# Altium PCB Buzzer_PCB.PcbDoc
Units mm, origin at the board's own origin, x right, y up, seen from the top; angles counter-clockwise.
Board outline 18.5 x 30 mm, 2 copper layers (Top Layer, Bottom Layer), stack 1.571 mm thick; 6 components, 5 nets, 18 pads, 0 vias.
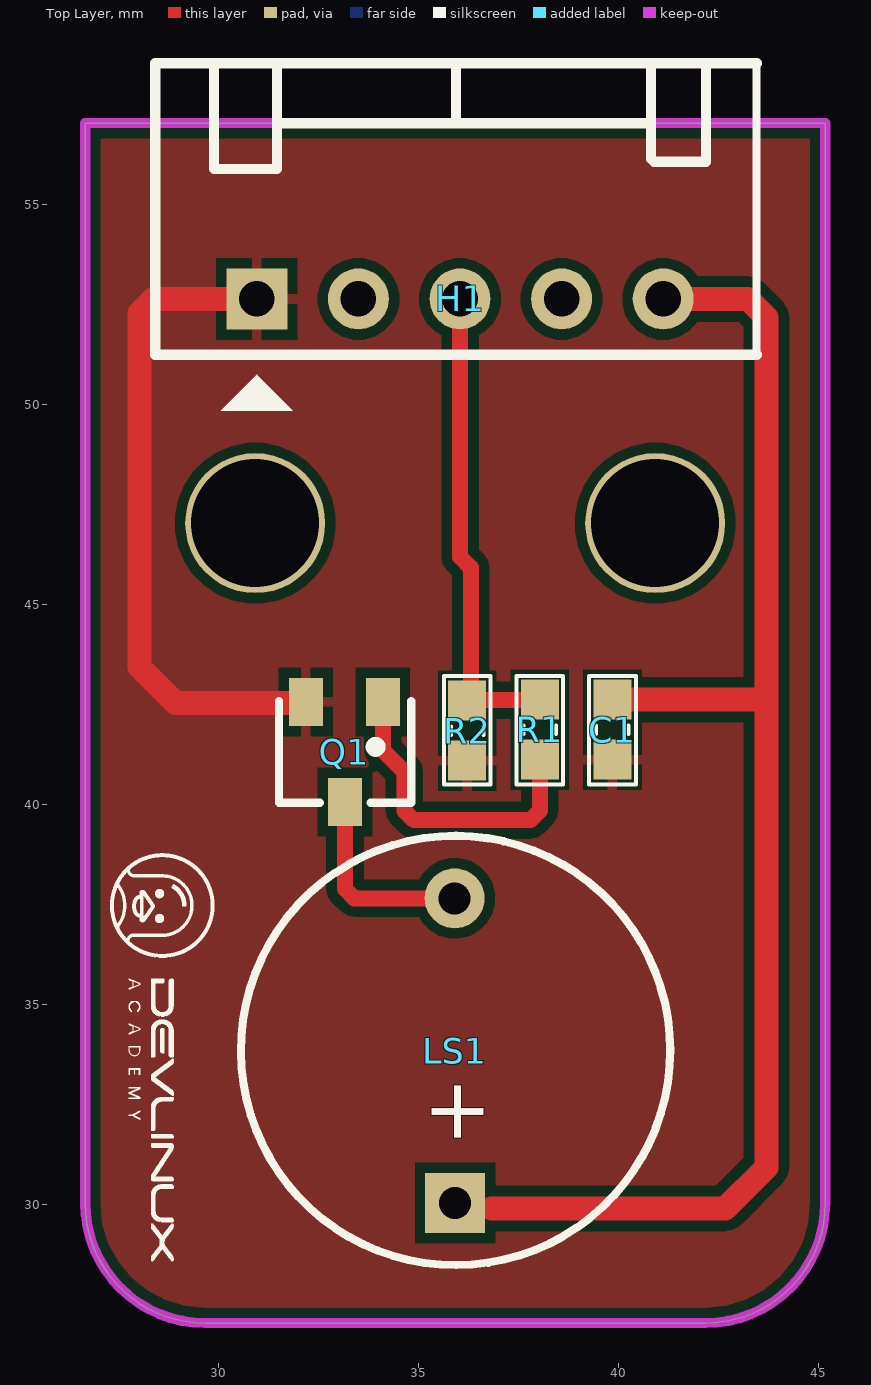
[diagram p0: Top Layer view]
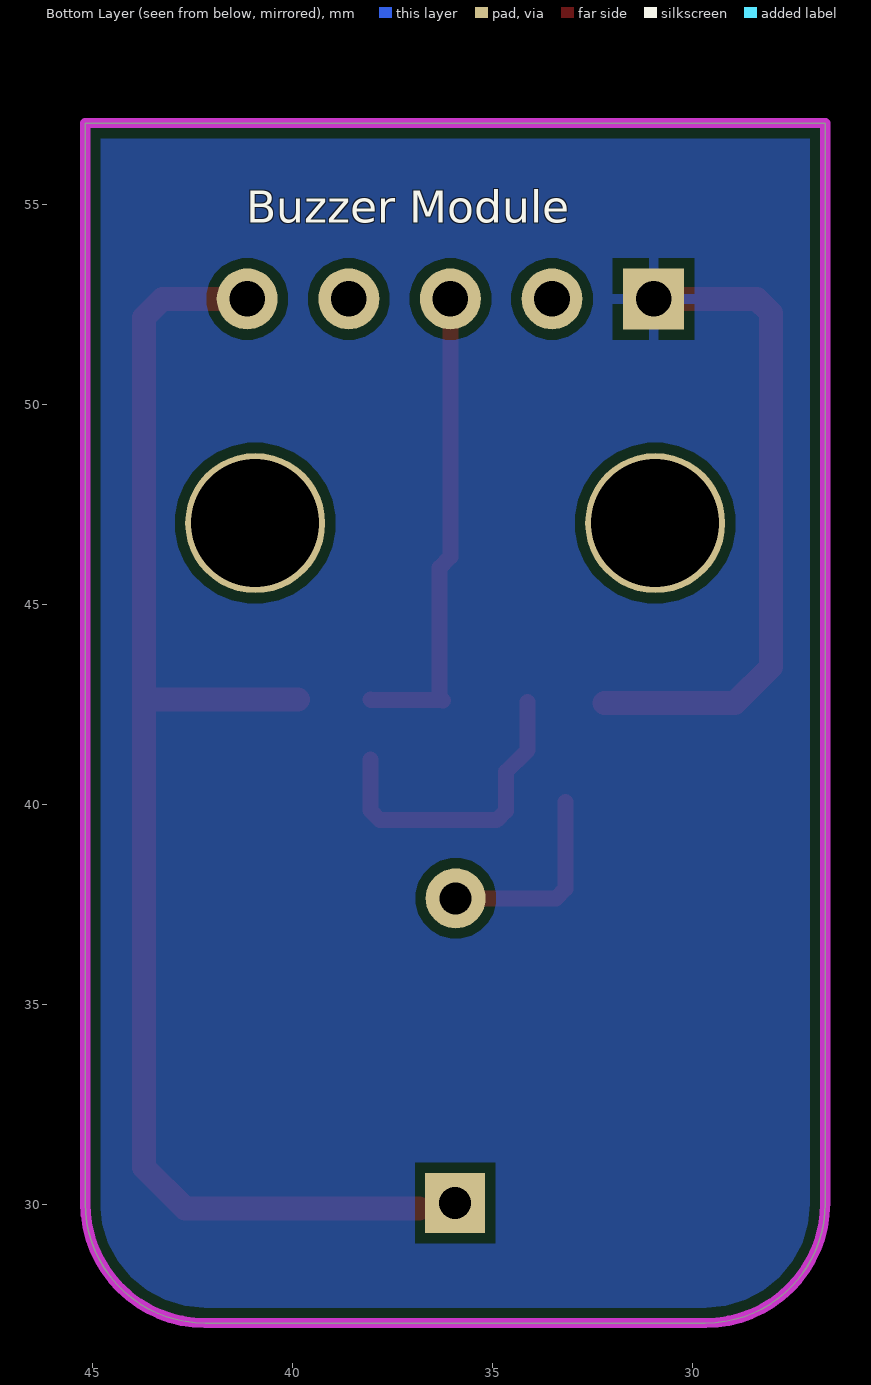
[diagram p1: Bottom Layer view, seen from below]
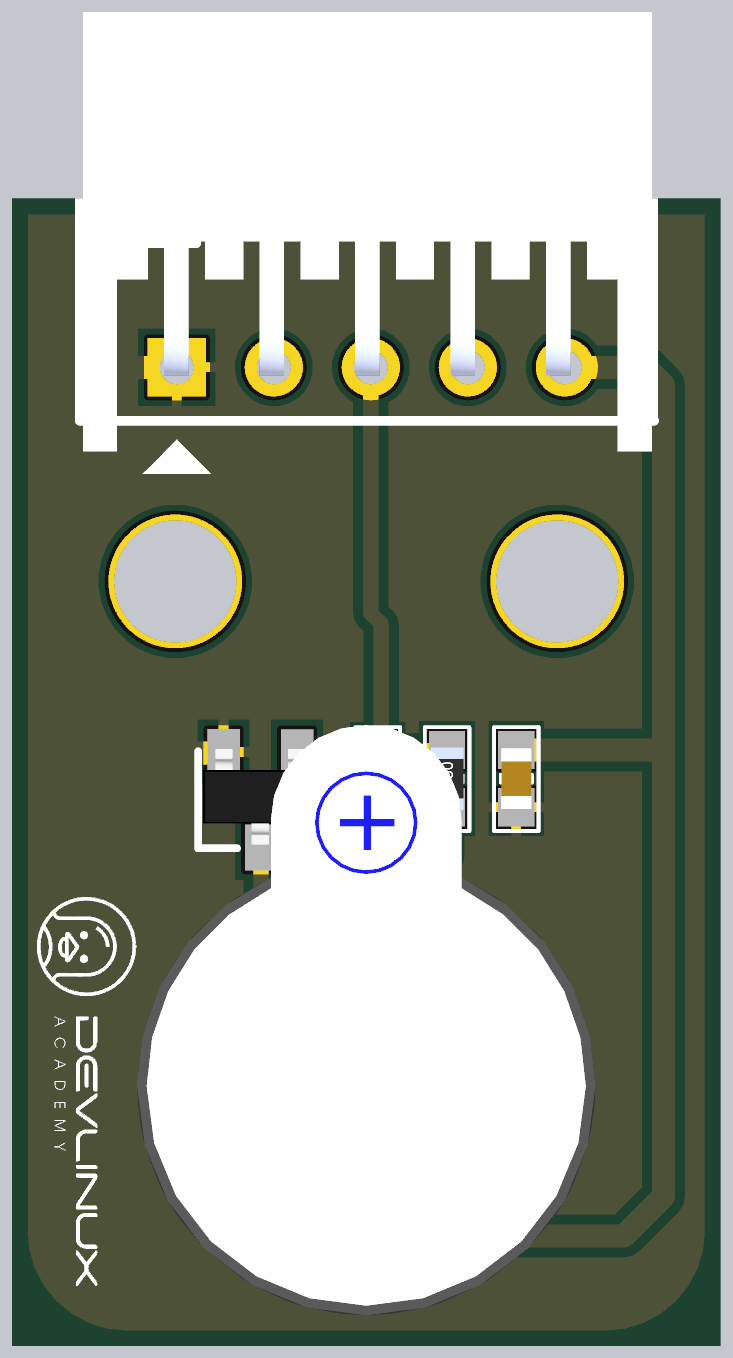
[diagram p2: 3D render of the assembled board from above, using the file's embedded part models]

## Layer stack, top to bottom
Top Solder: solder mask 0.0102, Solder Resist, Dk 3.5
Top Layer: signal copper 0.0356
Dielectric 1: dielectric 1.5, FR-4, Dk 4.8
Bottom Layer: signal copper 0.0356
Bottom Solder: solder mask 0.0102, Solder Resist, Dk 3.5

## Board outline
29.67,27.035 cw(c29.67,30.035) 26.67,30.035 26.67,57.035 45.17,57.035 45.17,30.035 cw(c42.17,30.035) 42.17,27.035

## Design rules (kind name [scope] priority, off if disabled: settings)
Clearance [All] p1: gap=0.254 ignorepadtopadclearanceinfootprint=FALSE except(0: Arc-Hole Track-Hole SMDPad-Hole THPad-Hole Via-Hole Fill-Hole Poly-Hole Region-Hole Text-Hole)
PolygonConnect [All] p1: connectstyle=Relief reliefconductorwidth=0.254 reliefentries=4 polygonreliefangle="90 Angle" airgapwidth=0.254
RoomDefinition Buzzer_SCH [InComponentClass('Buzzer_SCH')] p1: confinementstyle=ConfineIn formatcopy=TRUE lockcomponents=FALSE outline 11.227,62.205 57.582,62.205 57.582,83.414 11.227,83.414
RoutingVias [All] p1: holewidth=0.4 width=0.8 viastyle="Through Hole" minholewidth=0.3 minwidth=0.6 maxholewidth=0.5 maxwidth=1
SolderMaskExpansion [All] p1: expansion=0.102 istentingtop=FALSE
Width [All] p1: maxlimit=0.6 minlimit=0.254 preferedwidth=0.4
30 further rules are at their usual default settings.

## Components (designator, comment, footprint, x,y, rotation, side; value= is the part's Value field where it differs from the comment)
C1 "100nF" "tu 0603" 39.85,41.87 r270 top
H1 "Header 5P 2.54 Duc Cong" "Header 5P DC 2.54" 30.96,52.64 r90 top
LS1 "Coi Chip Speaker" "Coi Chip Speacker" 35.92,30.035 r90 top
Q1 "2SC1815" SOT-23 33.17,41.315 r180 top value=C9014
R1 "100" "tro smd 0603" 38.035,41.87 r270 top
R2 "100" "tro smd 0603" 36.22,41.845 r90 top

## Footprints (in the part's own frame and the unit in brackets; to place one, negate y for a bottom-side part, rotate by r counter-clockwise, add the part's x,y. Pads: shape width x height; smd on the part's side, far side on the other; paste and mask are expansions set on the pad)
"Coi Chip Speacker" [mm]
  rect 1.5x1.5 hole 0.8: 1(0,0)
  round 1.5 hole 0.8: 2(7.62,0.013)
  silkscreen extent -1.55,-5.38 9.18,5.36, body extent -2.22,-6 13.24,6, height 4.5
"Header 5P DC 2.54" [mil]
  rect 60x60 hole 35: 1(0,0)
  round 60 hole 35: 2(0,-100) 3(0,-200) 4(0,-300) 5(0,-400)
  silkscreen extent -110,-492 232,100, body extent -87,-490 366,97, height 240
SOT-23 [mm] "SOT 23 _ 1-3-2"
  rect 0.85x1.2 smd: 1(-0.94,-1.245) 2(0.985,-1.25) 3(0.005,1.25)
  silkscreen extent -1.65,-1.27 1.65,1.27, body extent -1.47,-1.33 1.53,1.17, height 1.06
"tro smd 0603" [mm] "Chip Capacitor, 2-Leads, Body 1,60x0,80mm, IPC Medium Density"
  rect 1x0.95 smd mask+0.076: 1(-0.75,0) 2(0.75,0)
  silkscreen extent -1.35,-0.58 1.37,0.58, body extent -0.82,-0.42 0.82,0.43, height 0.44
"tu 0603" [mm] "Chip Capacitor, 2-Leads, Body 1,60x0,80mm, IPC Medium Density"
  rect 1x0.95 smd mask+0.076: 1(-0.75,0) 2(0.75,0)
  silkscreen extent -1.35,-0.58 1.37,0.58, body extent -0.8,-0.4 0.8,0.4, height 0.9

## Part data
C1: library part "Tu 0603 104 50V 10%", "Dán", Chung_Loai=Dán, Don_Vi=Con, Ma_Hang=MH004568, So_Chan=2, Ten_Linh_Kien="Tụ 0603 104-100nF 10% 50V"
H1: "Cắm", Chung_Loai=Cắm, Don_Vi=Con, Ma_Hang=MH001308, Ten_Linh_Kien="Header 5P XH2.54-5P Đực Cong"
LS1: "Còi chip"
Q1: library part "Trans C1815 HF SMD", "SOT-23"
R1 R2: library part "Tro 0603 5% 100R", "Dán", Chung_Loai=Dán, Don_Vi=Con, Ma_Hang=MH006315, So_Chan=2, Ten_Linh_Kien="Trở 0603 5% 100R"

## Free pads (board coordinates)
  round 3.5 hole 3.2: 8(30.92,47.035) 8(40.92,47.035)

## Nets (pads, with @x,y where several pads share a name; then routed paths per layer and width w, separated by ;. In a path a pad name is that pad's centre, name@x,y a point inside that pad or via, vN(x,y) a via of type N, cw(c..) or ccw(c..) an arc to the next point about the centre after c; other vN are vias at no path point)
+5: C1.1 H1.5 LS1.1 | length 35.2
  Top Layer w0.6: 36.83,29.9 42.67,29.9 43.7,30.93 43.7,42.62 ; C1.1 43.7,42.62 ; H1.5 43.24,52.64 43.7,52.18 43.7,42.62
BUZZER: H1.3 R1.1 R2.2 | length 11.9
  Top Layer w0.4: H1.3 36.04,46.194 36.31,45.924 R2.2@36.31,42.65 ; R2.2 36.233,42.607 38.022,42.607 R1.1
GND: C1.2 H1.1 Q1.2 R2.1 | length 16.5
  Top Layer w0.6: H1.1 28.381,52.64 28.03,52.289 28.03,43.44 28.931,42.539 32.18,42.539 Q1.2@32.185,42.535
NetLS1_2: LS1.2 Q1.3 | length 5
  Top Layer w0.4: Q1.3 33.165,37.889 33.399,37.655 LS1.2
NetQ1_1: Q1.1 R1.2 | length 7.8
  Top Layer w0.4: Q1.1 34.11,41.36 34.65,40.82 34.65,39.844 34.884,39.61 37.8,39.61 38.035,39.845 R1.2
pads on no net: H1.2 H1.4

## Polygon pours and split planes (outlines as drawn)
no net on Top Overlay "NONET_L01_P-001" (solid): 26.67,57.04 26.671,57.039 42.667,57.039
GND on Top Layer "GND_L01_P000" (solid, remove dead copper, pour order 0): 26.67,57.04 45.17,57.04 45.17,27.035 26.67,27.035
GND on Bottom Layer "GND_L02_P001" (solid, remove dead copper, pour order 1): 26.67,57.04 45.17,57.04 45.17,27.035 26.68,27.035

## Keep-outs
Keep-Out Layer:
  the board outline again, w0.254

## Silkscreen, mask and mechanical layers (free items; w line width, h text height)
Top Overlay:
  drawing of 21 lines, arcs and shapes, not listed
Bottom Overlay:
  text "Buzzer Module" at 41.14,54.54 h0.8

## Text inside footprints (layer, text, board x,y; h text height)
LS1: Top Overlay "+" at 36.631,31.445 h1.52 r90